# Altium PCB Paylaod.PcbDoc
Units mm, origin at the board's own origin, x right, y up, seen from the top; angles counter-clockwise.
Board outline 95.22 x 95.2 mm, 2 copper layers (Top Layer, Bottom Layer); 7 components, 7 nets, 26 pads, 0 vias.
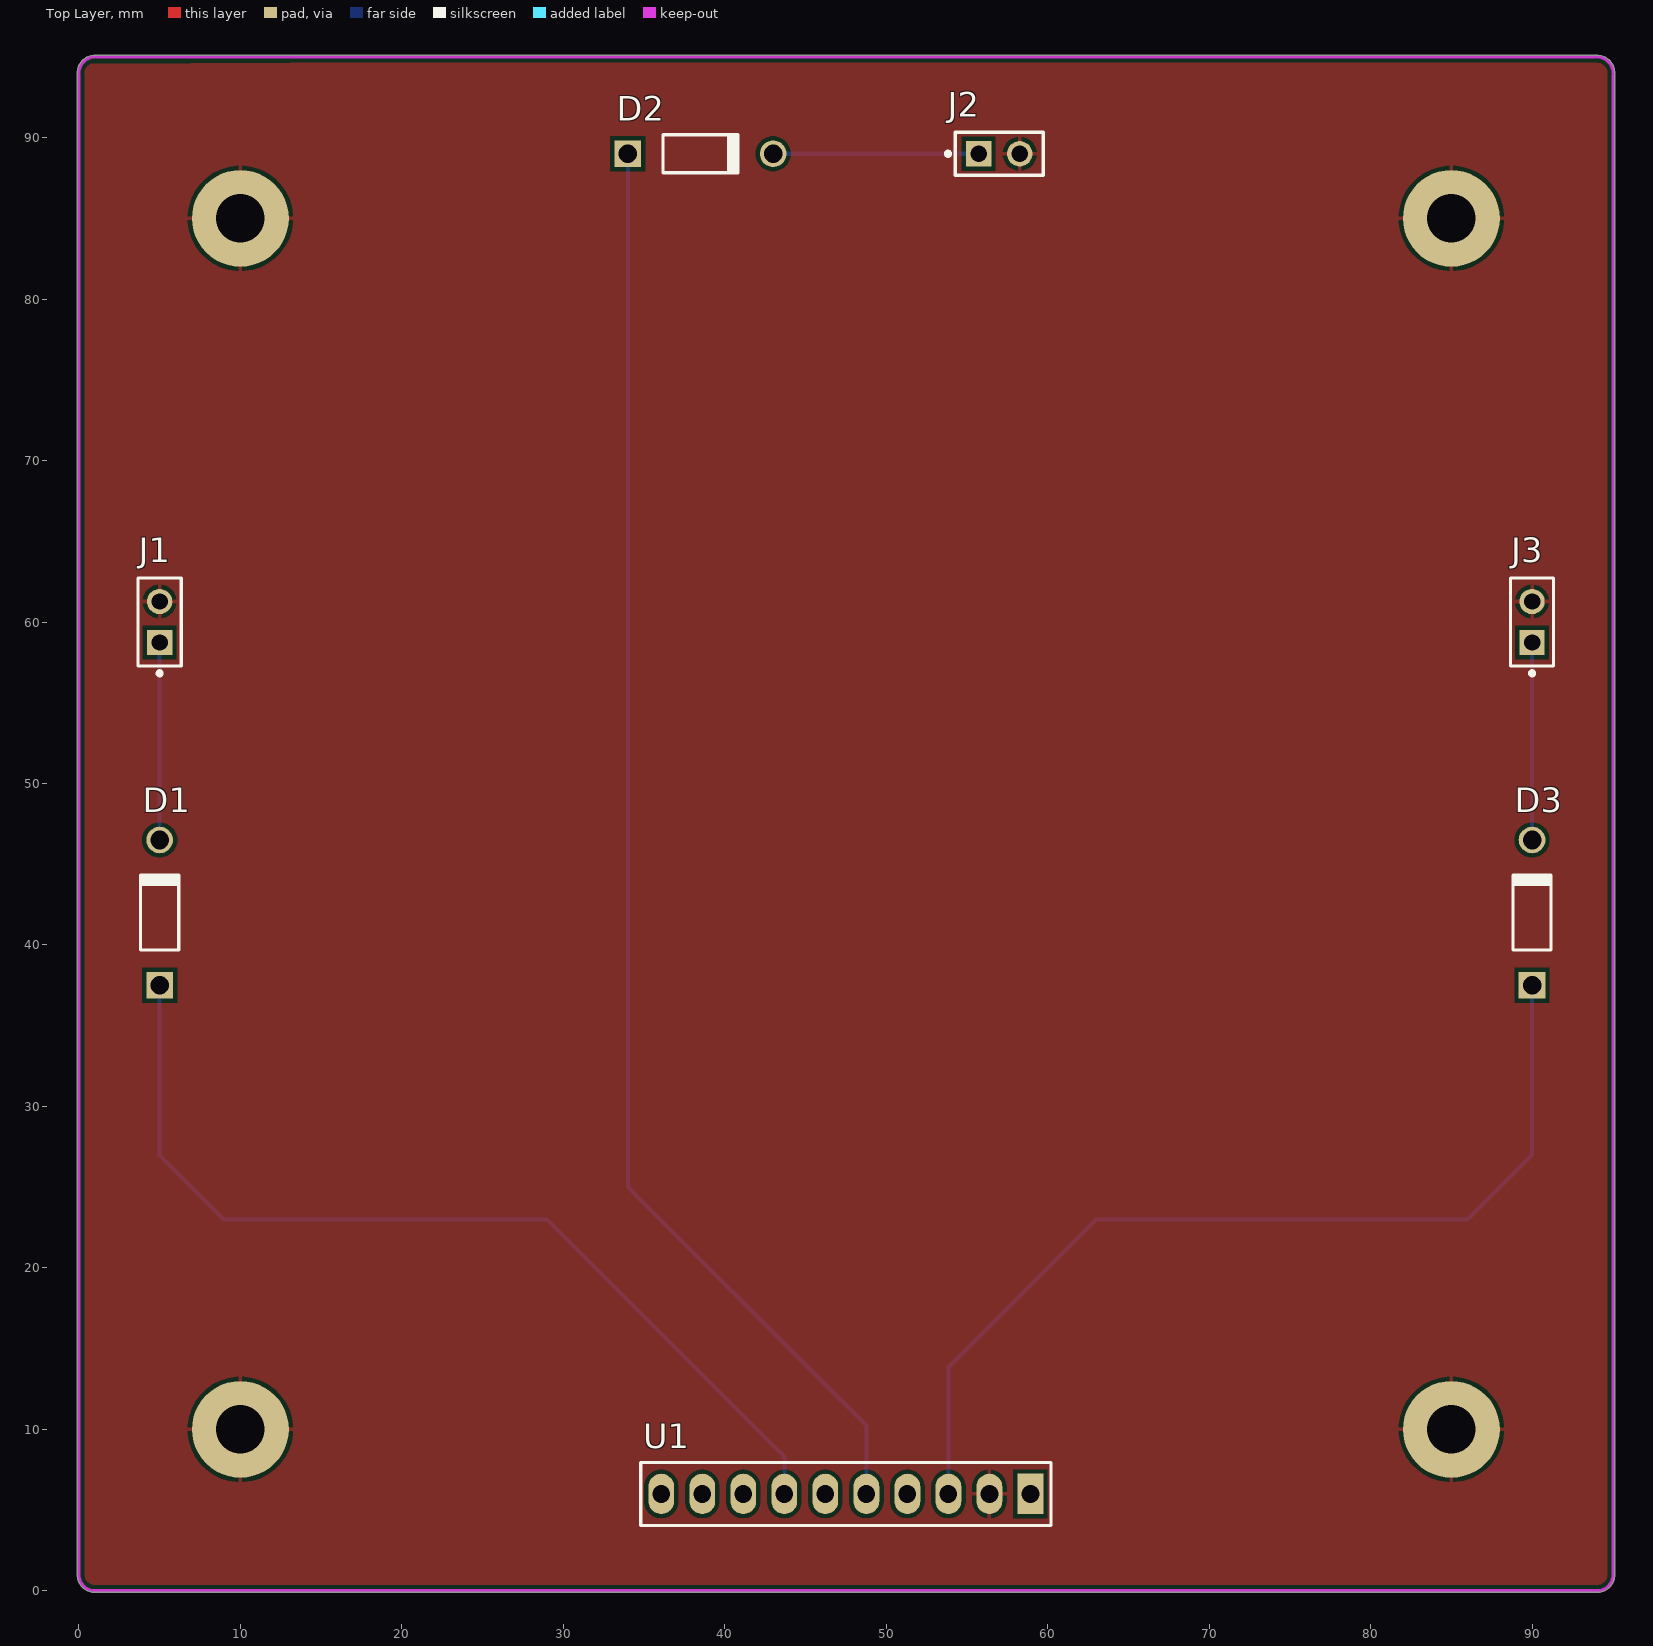
[diagram p0: Top Layer view]
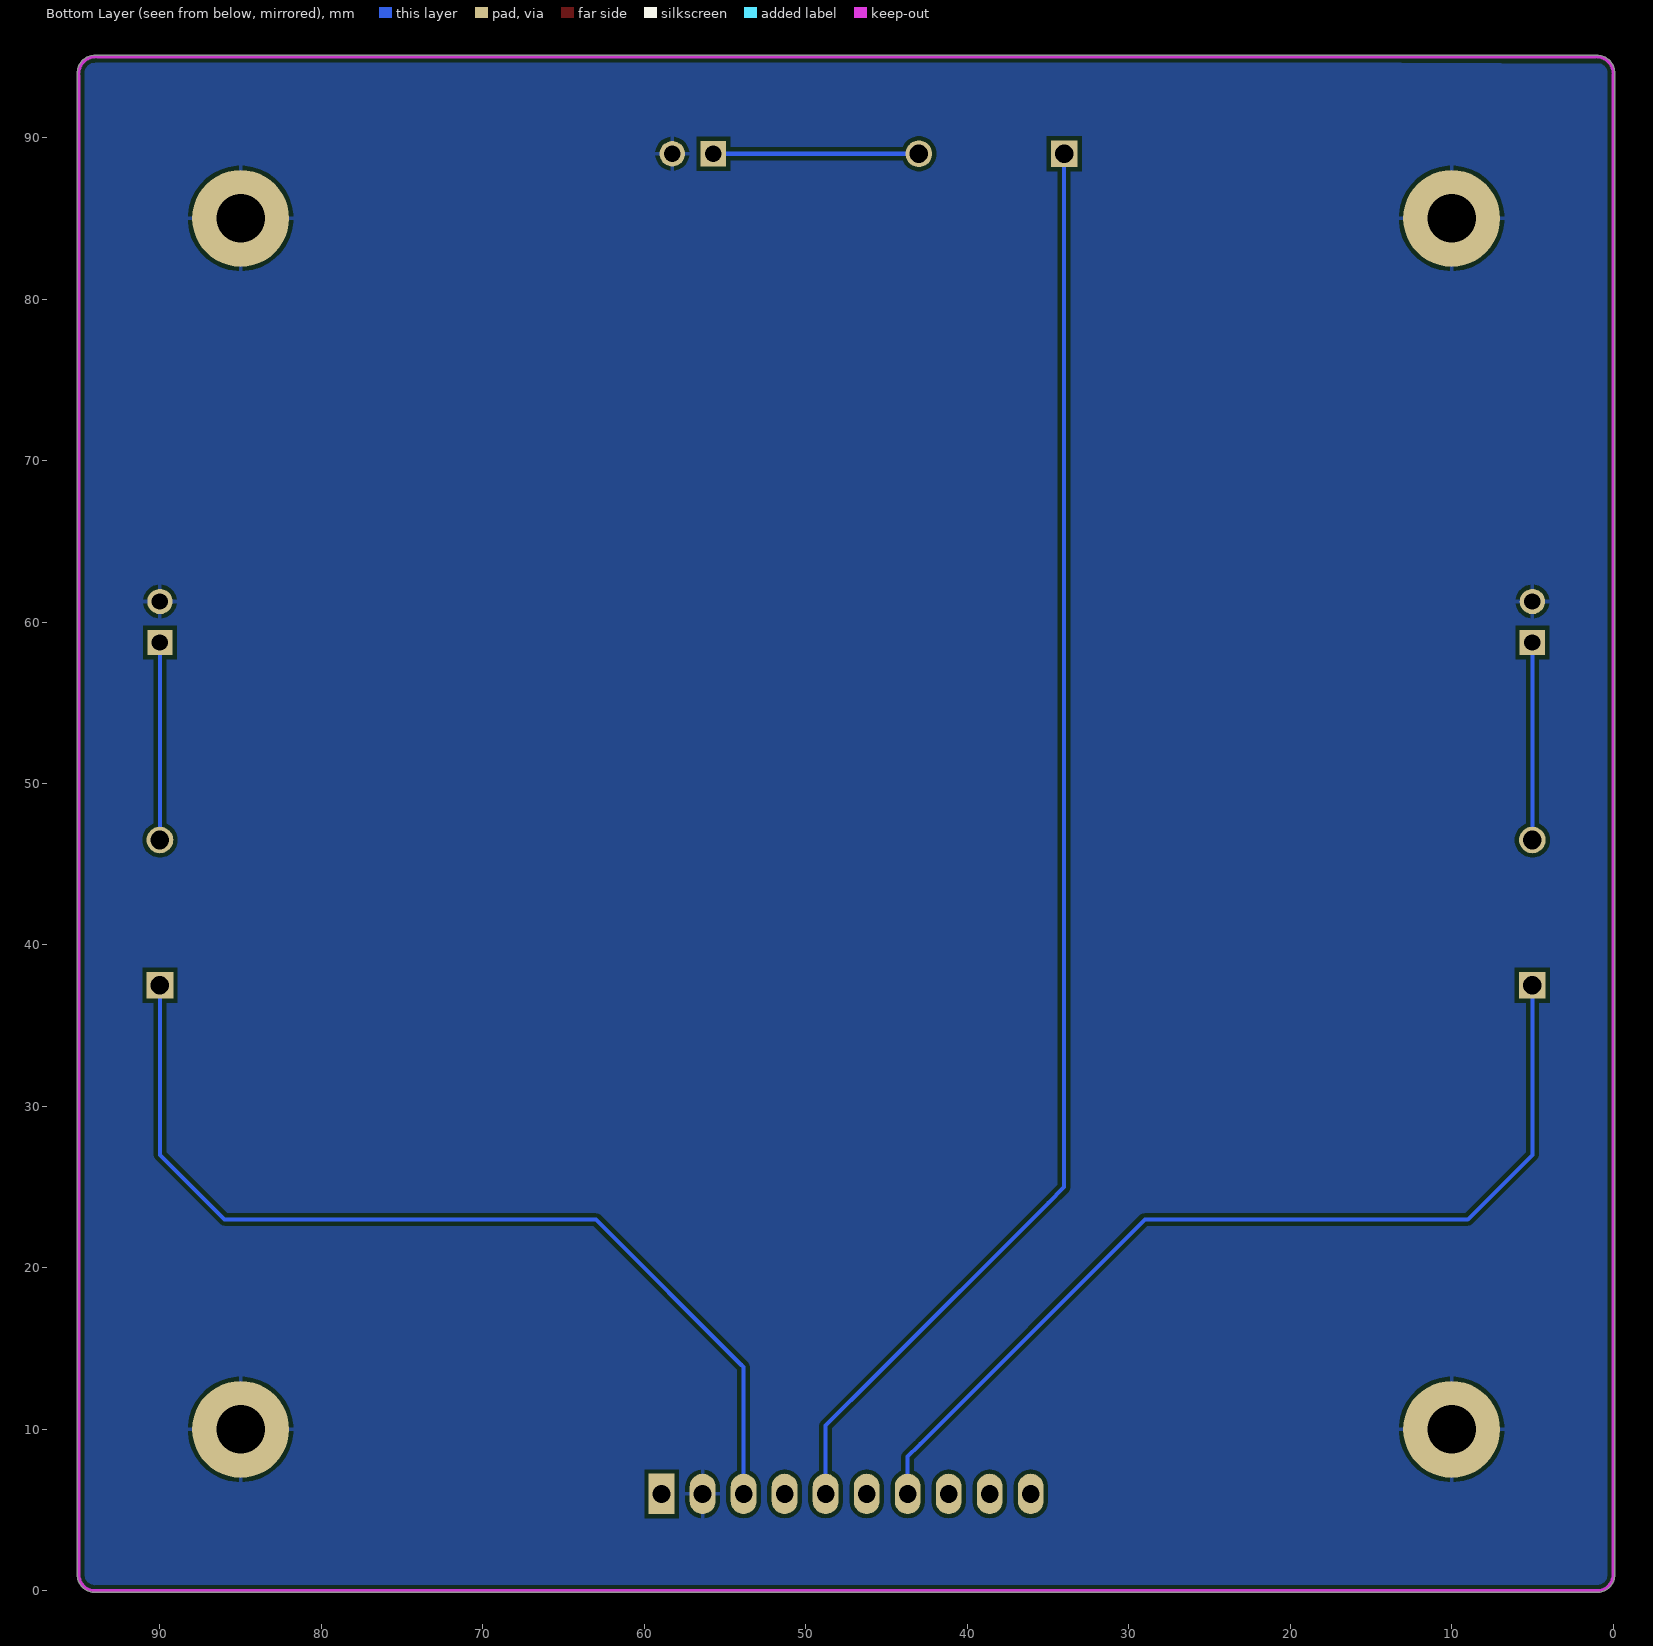
[diagram p1: Bottom Layer view, seen from below]
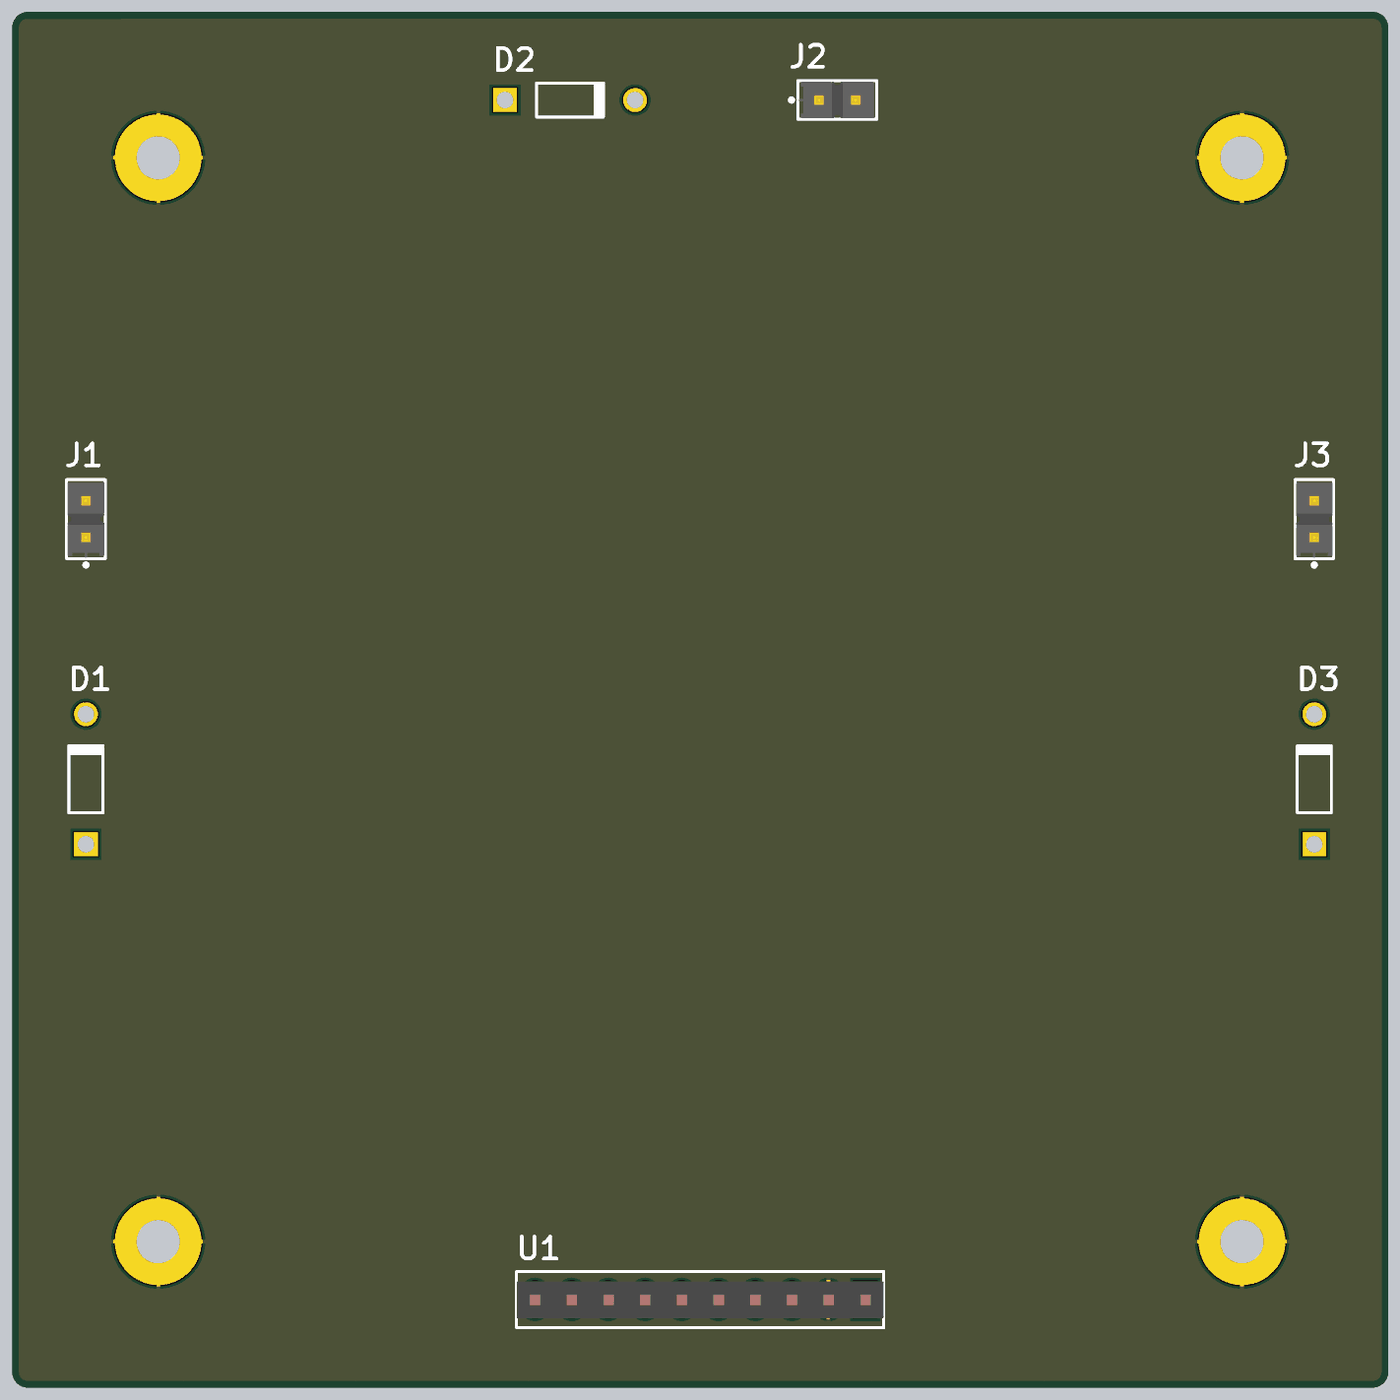
[diagram p2: 3D render of the assembled board from above, using the file's embedded part models]

## Layer stack, top to bottom
Top Solder: solder mask 0.0102, Solder Resist, Dk 3.5
Top Layer: signal copper 0.0356
Dielectric 1: dielectric 0.32, FR-4, Dk 4.8
Bottom Layer: signal copper 0.0356
Bottom Solder: solder mask 0.0102, Solder Resist, Dk 3.5

## Board outline
0.999,-0.1 cw(c1,1) -0.1,1 -0.1,94 cw(c1,94) 1,95.1 93.9,95.1 94.02,95.1 cw(c94.02,94) 95.12,94 95.12,93.88 95.12,1 cw(c94.02,1) 94.02,-0.1

## Design rules (kind name [scope] priority, off if disabled: settings)
Clearance [All] p1: gap=0.254 ignorepadtopadclearanceinfootprint=FALSE
PolygonConnect [All] p1: connectstyle=Relief reliefconductorwidth=0.254 reliefentries=4 polygonreliefangle="90 Angle" airgapwidth=0.254
RoutingVias [All] p1: holewidth=0.711 width=1.27 viastyle="Through Hole" minholewidth=0.711 minwidth=1.27 maxholewidth=0.711 maxwidth=1.27
SolderMaskExpansion [All] p1: expansion=0.102 istentingtop=FALSE
Width [All] p1: maxlimit=0.254 minlimit=0.254 preferedwidth=0.254
30 further rules are at their usual default settings.

## Classes and differential pairs
component class Paylaod: D1 D2 D3 J2 U1

## Components (designator, comment, footprint, x,y, rotation, side; value= is the part's Value field where it differs from the comment)
D1 "1N4004-T" DIOD-DO-41-P-2_V 5,42 r90 top
D2 "1N4004-T" DIOD-DO-41-P-2_V 38.5,89 r0 top
D3 "1N4004-T" DIOD-DO-41-P-2_V 90,42 r90 top
J1 "TSW-102-07-F-S" FP-TSW-102-07-F-S-MFG 5,60 r90 top
J2 "TSW-102-07-F-S" FP-TSW-102-07-F-S-MFG 57,89 r0 top
J3 "TSW-102-07-F-S" FP-TSW-102-07-F-S-MFG 90,60 r90 top
U1 "Stackable Pin Bus" STACKABLE_PIN_BUS 47.5,6 r270 top

## Footprints (in the part's own frame and the unit in brackets; to place one, negate y for a bottom-side part, rotate by r counter-clockwise, add the part's x,y. Pads: shape width x height; smd on the part's side, far side on the other; paste and mask are expansions set on the pad)
DIOD-DO-41-P-2_V [mm] "2-Leads, Axial Lead, Body 4.635x2.36mm, Pin Spacing 9mm"
  rect 1.65x1.65 hole 1.15: 1(-4.5,0)
  round 1.65 hole 1.15: 2(4.5,0)
  silkscreen extent -2.32,-1.18 2.32,1.18, body extent -4.93,-1.18 4.93,1.18, height 2.35
FP-TSW-102-07-F-S-MFG [mm]
  rect 1.57x1.57 hole 1.02 paste-2539.97 mask+0: 1(-1.27,0)
  round 1.57 hole 1.02 paste-2539.97 mask+0: 2(1.27,0)
  silkscreen extent -3.3,-1.34 2.73,1.34, body extent -2.83,-1.44 2.83,1.44, height 0.25
STACKABLE_PIN_BUS [mm]
  rect 2.5x1.6 hole 1.1: 1(0,11.43)
  oval 2.5x1.6 hole 1.1: 2(0,8.89) 3(0,6.35) 4(0,3.81) 5(0,1.27) 6(0,-1.27) 7(0,-3.81) 8(0,-6.35) 9(0,-8.89) 10(0,-11.43)
  silkscreen extent -1.94,-12.7 1.95,12.7, body extent -1.25,-12.69 1.29,12.71, height 8

## Part data
D1 D2 D3: library part CMP-0639-00014-2, "1.0 A Rectifier, 15 pF, 400 V, -65 to 150 degC, 2-Pin DO-41 Plastic, RoHS, Tape and Reel", Manufacturer="Diodes Inc", Max. Average Rectified Current IO (A)=1, Operating Temperature Range (degC)="-65 to 150", ComponentLink1Description="Manufacturer URL", ComponentLink1URL=http://diodes.com/, ComponentLink2Description=Datasheet, ComponentLink2URL=http://diodes.com/datasheets/ds28002.pdf, CT (pF)=15, DatasheetVersion="Rev. 8-2", Max. IFSM (A)=30, Max. IR (uA)=5, Mounting Technology="Through Hole", PackageDescription="2-Pin Axial Lead, Body 4.635 x 2.36 mm, Lead Spread 25.4 mm", PackageReference=DO-41-P-2, Packing="Tape and Reel", PartNumber=1N4004-T, RoHS=TRUE, VF (V)=1, VRRM (V)=400
J1 J2 J3: library part CMP-02766-001458-1, "CONN HEADER VERT 2POS 2.54MM", Color=Black, Flammability Rating="UL94 V-0", Max Current Rating=7.6A, Max Operating Temperature=125°C, Max Voltage Rating (AC)=550V, Min Operating Temperature=-55°C, Package Quantity=1, Connector Type=Header, Contact Finish - Mating=GOLD, Contact Material=Bronze, Contact Mating Length=0.23inch, Contact Plating=Gold, Contact Shape=Square, Contact Type="Male Pin", Depth=2.54mm, Fastening Type=Pull, Gender=Male, Housing Color=Black, Housing Material=Polyester, Insulation Color=Black, Insulation Material=PBT, Length=5.08mm, Mount="Through Hole", Number of Contacts=2, Number of Positions=2, Number of Rows=1, Orientation=Straight, Packaging=Bulk, Pitch=2.54mm, Radiation Hardening=No, REACH SVHC="No SVHC", RoHS Compliant=Yes, Series=TSW, Termination=Solder
U1: library part "Barramento Empilhável", "10 pinos, Passo 2.54mm, Dimensões da barra 26x2x8mm"

## Free pads (board coordinates)
  round 6 hole 3: GND(10,10) GND(10,85) GND(85,10) GND(85,85)

## Nets (pads, with @x,y where several pads share a name; then routed paths per layer and width w, separated by ;. In a path a pad name is that pad's centre, name@x,y a point inside that pad or via, vN(x,y) a via of type N, cw(c..) or ccw(c..) an arc to the next point about the centre after c; other vN are vias at no path point)
C0: D3.1 U1.3 | length 59.9
  Bottom Layer w0.254: U1.3 53.85,13.85 54,14 63,23 86,23 90,27 D3.1
C1: D2.1 U1.5 | length 89.1
  Bottom Layer w0.254: D2.1 34,25 35,24 45.73,13.27 48.77,10.23 U1.5
C2: D1.1 U1.7 | length 59.1
  Bottom Layer w0.254: D1.1 5,27 9,23 29,23 42.926,9.074 ; 43,9 43.69,8.31 U1.7
GND: J1.2 J2.2 J3.2 pad.GND U1.2
OUT0: D3.2 J3.1 | length 12.2
  Bottom Layer w0.254: D3.2 J3.1
OUT1: D2.2 J2.1 | length 12.7
  Bottom Layer w0.254: D2.2 J2.1
OUT2: D1.2 J1.1 | length 12.2
  Bottom Layer w0.254: D1.2 J1.1
pads on no net: U1.1 U1.4 U1.6 U1.8 U1.9 U1.10

## Polygon pours and split planes (outlines as drawn)
GND on Bottom Layer "GND_BOTTOM" (solid, pour order 1): 0.35,94.575 0,94.225 0,0 -0.05,0 0,0.05 95.025,0.05 95.025,95 94.975,95.05
GND on Top Layer "GND_TOP" (solid, pour order 0): 0.35,94.575 0,94.225 0,0 -0.05,0 0,0.05 95.025,0.05 95.025,95 94.975,95.05

## Keep-outs
Keep-Out Layer:
  lines w0.2: 0,93.9 0,1 ccw(c1,1) 1,0 94.02,0 ccw(c94.02,1) 95.02,1 95.02,93.88 ; 0,94 cw(c1,94) 1,95 ; 1.1,95 93.9,95 ; 94.02,95 cw(c94.02,94) 95.02,94